# EAGLE board LinCorrector3 (EAGLE 7.4.0)
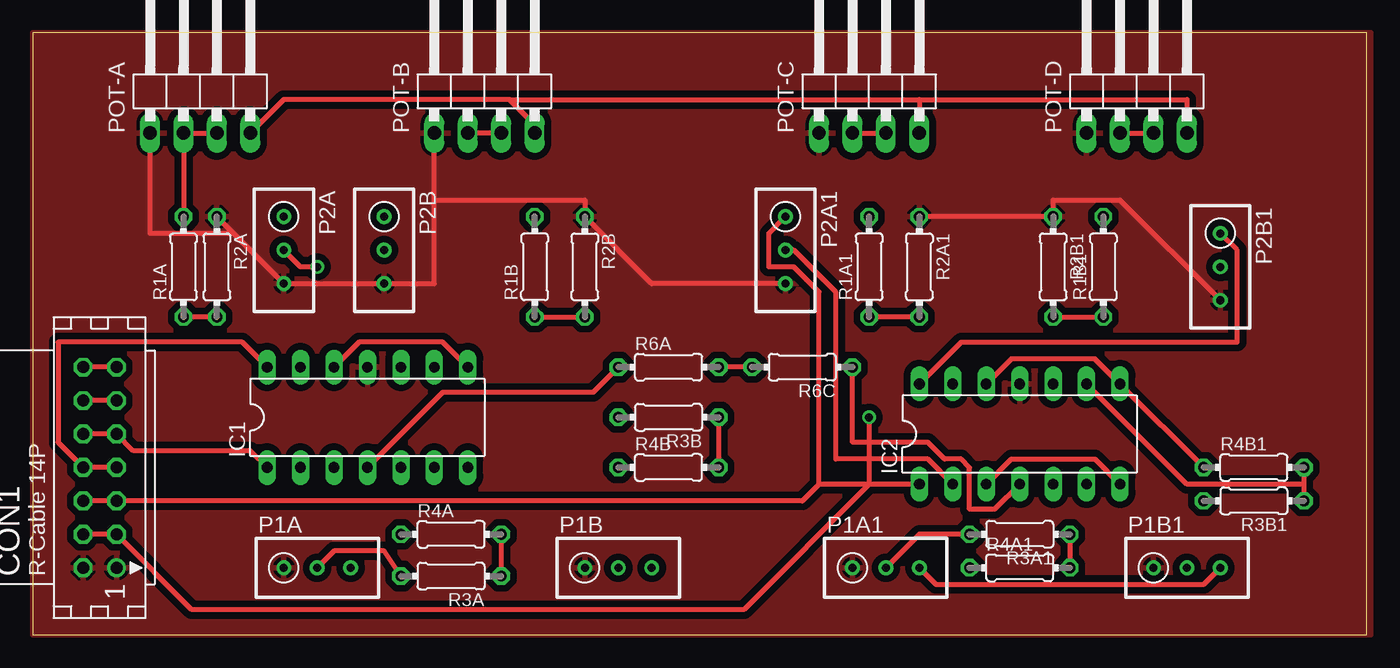
[diagram p0: board, top side]
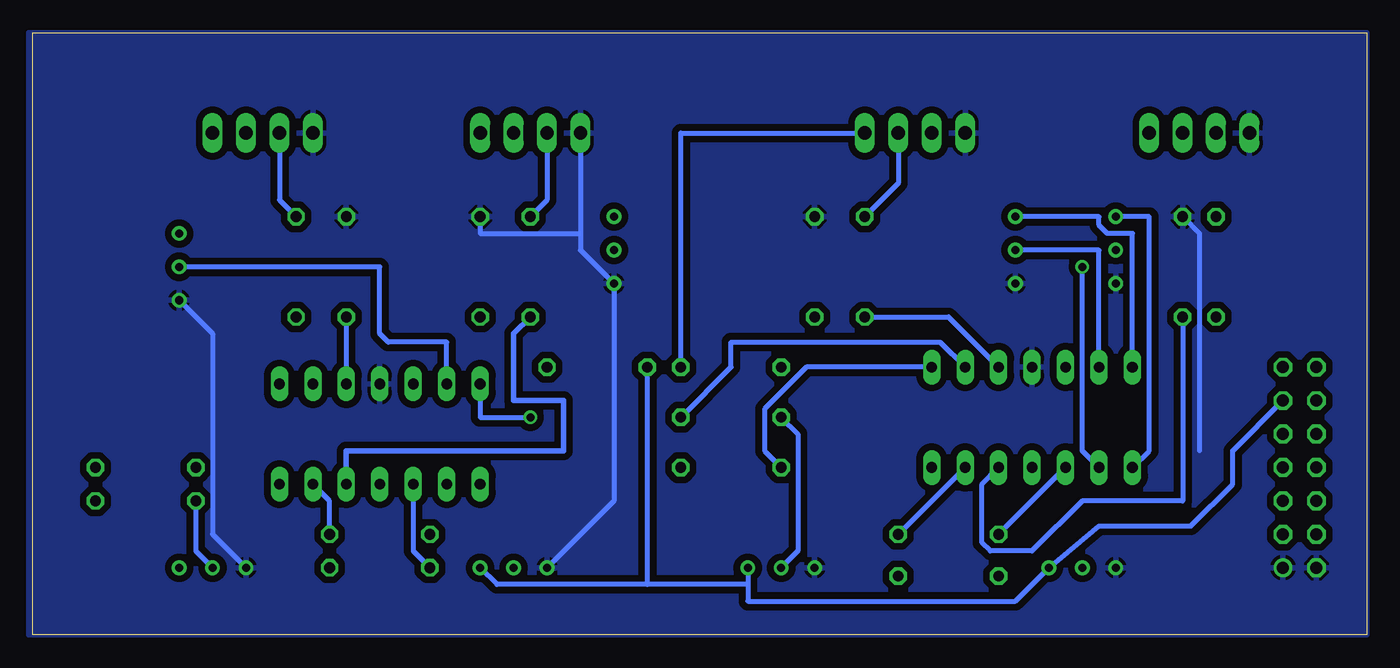
[diagram p1: board, bottom side, seen from below]

Size 101.27 x 45.71 mm. Coordinates in mm from the lower left corner, seen from the top.
Outline: 0,0 101.27,0 101.27,45.71 0,45.71 0,0
Copper layers (1*16): Top 0.035mm / dielectric 1.5mm / Bottom 0.035mm
Design rules "default *": minimum track width 10mil, minimum drill 24mil, track to track 20mil, track to pad 20mil, pad to pad 20mil, via to via 20mil, smd to smd 8mil, copper to edge 0mil, drill to drill 8mil, minimum pad ring 10mil, minimum via ring 8mil, stop-mask expansion 4mil, vias tented up to drill 0mil, thermal gap 10mil
Net classes: 0 default: width 0.381 mm, drill 0.508 mm, clearance 0.381 mm

## Footprints (pad centres in the part's own frame; a part is rotated, then mirrored left to right if it is on the bottom)
CON14 = drill 0.914: 1 -7.62,-1.27 | drill 0.914 octagon: 2 -7.62,1.27; 3 -5.08,-1.27; 4 -5.08,1.27; 5 -2.54,-1.27; 6 -2.54,1.27; 7 0,-1.27; 8 0,1.27; 9 2.54,-1.27; 10 2.54,1.27; 11 5.08,-1.27; 12 5.08,1.27; 13 7.62,-1.27; 14 7.62,1.27
DIL14 = drill 0.813 long: 1 -7.62,-3.81; 2 -5.08,-3.81; 3 -2.54,-3.81; 4 0,-3.81; 5 2.54,-3.81; 6 5.08,-3.81; 7 7.62,-3.81; 8 7.62,3.81; 9 5.08,3.81; 10 2.54,3.81; 11 0,3.81; 12 -2.54,3.81; 13 -5.08,3.81; 14 -7.62,3.81
RTRIM3296W = drill 0.61: 1 0,-2.54; 2 0,0; 3 0,2.54
1X04/90 = drill 1.016 long: 1 -3.81,-3.81; 2 -1.27,-3.81; 3 1.27,-3.81; 4 3.81,-3.81
0204/7 = drill 0.813 octagon: 1 -3.81,0; 2 3.81,0

## Placement (x,y rotation side)
CON1  [CON14]  5.08,12.7 90 top
IC1  MCP604P  [DIL14]  25.4,16.51 0 top
IC2  MCP604P  [DIL14]  74.93,15.24 0 top
P1A  500k  [RTRIM3296W]  21.59,5.08 270 top
P1A1  500k  [RTRIM3296W]  64.77,5.08 270 top
P1B  500k  [RTRIM3296W]  44.45,5.08 270 top
P1B1  500k  [RTRIM3296W]  87.63,5.08 270 top
P2A  500k  [RTRIM3296W]  19.05,29.21 180 top
P2A1  500k  [RTRIM3296W]  57.15,29.21 180 top
P2B  500k  [RTRIM3296W]  26.67,29.21 180 top
P2B1  500k  [RTRIM3296W]  90.17,27.94 180 top
POT-A  [1X04/90]  12.7,41.91 0 top
POT-B  [1X04/90]  34.29,41.91 0 top
POT-C  [1X04/90]  63.5,41.91 0 top
POT-D  [1X04/90]  83.82,41.91 0 top
R1A  10k  [0204/7]  11.43,27.94 90 top
R1A1  10k  [0204/7]  63.5,27.94 90 top
R1B  10k  [0204/7]  38.1,27.94 90 top
R1B1  10k  [0204/7]  81.28,27.94 90 top
R2A  10k  [0204/7]  13.97,27.94 270 top
R2A1  10k  [0204/7]  67.31,27.94 270 top
R2B  10k  [0204/7]  41.91,27.94 270 top
R2B1  10k  [0204/7]  77.47,27.94 270 top
R3A  10k  [0204/7]  31.75,4.45 180 top
R3A1  10k  [0204/7]  74.93,7.62 180 top
R3B  10k  [0204/7]  48.26,16.51 180 top
R3B1  10k  [0204/7]  92.71,10.16 180 top
R4A  10k  [0204/7]  31.75,7.62 0 top
R4A1  10k  [0204/7]  74.93,5.08 0 top
R4B  10k  [0204/7]  48.26,12.7 0 top
R4B1  10k  [0204/7]  92.71,12.7 0 top
R6A  0  [0204/7]  48.26,20.32 0 top
R6C  0  [0204/7]  58.42,20.32 180 top

## Library data of the parts
CON1 = con-harting; OC_FARNELL: unknown; OC_NEWARK: unknown
IC1 IC2 = linear
P1A P1A1 P1B P1B1 P2A P2A1 P2B P2B1 R6A R6C = resistor
POT-A POT-B POT-C POT-D = pinhead
R1A R1A1 R1B R1B1 R2A R2A1 R2B R2B1 R3A R3A1 R3B R3B1 R4A R4A1 R4B R4B1 = rcl

## Nets
GND: CON1.1 CON1.2 IC1.11 IC2.11 P1A1.1 P1A.1 P1B1.1 P1B.1 P2A1.3 P2A.3 P2B1.3 P2B.3 POT-A.1 POT-B.1 POT-C.1 POT-D.1 R2A1.1 R2A.1 R2B1.1 R2B.1
N$1: IC1.5 R1A.1 R2A.2
N$2: POT-A.2 POT-A.3 R1A.2
N$3: P1A.2 R3A.2
N$4: IC1.6 R3A.1 R4A.2
N$5: IC1.3 R4A.1
N$6: IC1.10 R1B.1 R2B.2
N$7: IC1.2 P2A.2
N$8: CON1.9 CON1.10 IC1.1 P2A.1
N$9: P1B.2 R3B.2
N$10: IC1.9 R3B.1 R4B.2
N$11: IC1.8 IC1.12 R4B.1
N$12: IC1.13 P2B.2
N$13: CON1.7 CON1.8 IC1.14 P2B.1
N$14: POT-B.2 POT-B.3 R1B.2
N$15: IC2.5 R1A1.1 R2A1.2
N$16: P1A1.2 R3A1.2
N$17: IC2.6 R3A1.1 R4A1.2
N$18: IC2.3 IC2.7 R4A1.1
N$19: IC2.2 P2A1.2
N$20: CON1.5 CON1.6 IC2.1 P2A1.1
N$21: POT-C.2 POT-C.3 R1A1.2
N$22: IC2.10 R1B1.1 R2B1.2
N$23: P1B1.2 R3B1.2
N$24: IC2.9 R3B1.1 R4B1.2
N$25: IC2.8 IC2.12 R4B1.1
N$26: IC2.13 P2B1.2
N$28: POT-D.2 POT-D.3 R1B1.2
N$29: CON1.3 CON1.4 IC2.14 P2B1.1
N$33: IC1.4 R6A.1
N$35: IC2.4 R6C.1
N$47: CON1.13 CON1.14
VCC: CON1.11 CON1.12 P1A1.3 P1A.3 P1B1.3 P1B.3 POT-A.4 POT-B.4 POT-C.4 POT-D.4 R6A.2 R6C.2

## Tracks (layer width: path | path; a pad name or v marks a point on that pad's centre or on a via)
GND
  Top 0.381: R2A.1 15.24,30.48 | 15.24,30.48 P2A.3 P2B.3 30.48,26.67 30.48,33.02 | POT-A.1 8.89,30.48 15.24,30.48 | 30.48,33.02 POT-B.1 | 30.48,33.02 41.91,33.02 R2B.1 46.99,26.67 P2A1.3 | R2A1.1 R2B1.1 77.47,33.02 82.55,33.02 P2B1.3
  Bottom 0.381: 12.7,13.97 12.7,30.48 R2A.1 | P1B1.1 87.63,7.62 87.63,22.86 P2B1.3 | POT-C.1 59.69,30.48 | 59.69,30.48 59.69,29.21 P2A1.3 57.15,10.16 P1A1.1 | 59.69,30.48 67.31,30.48 R2A1.1
  pour Bottom: 0,45.72 101.6,45.72 101.6,0 0,0
  pour Top: 0,45.72 101.6,45.72 101.6,0 0,0
N$1
  Top 0.381: R2A.2 R1A.1
  Bottom 0.381: IC1.5 29.21,11.43 29.21,6.99 28.57,6.35 25.4,6.35 21.59,10.16 13.97,10.16 R2A.2
N$2
  Top 0.381: R1A.2 POT-A.2 POT-A.3
N$3
  Top 0.381: P1A.2 22.86,6.35 26.67,6.35 R3A.2
N$4
  Top 0.381: R4A.2 R3A.1
  Bottom 0.381: R4A.2 IC1.6
N$5
  Bottom 0.381: R4A.1 IC1.3
N$6
  Top 0.381: R1B.1 R2B.2
  Bottom 0.381: IC1.10 31.75,24.13 R1B.1
N$7  (via drill 0.61)
  Top 0.381: P2A.2 20.32,27.94 v21.59,27.94
  Bottom 0.381: v21.59,27.94 21.59,13.97 IC1.2
N$8
  Top 0.381: CON1.10 CON1.9 7.62,13.97 16.51,13.97 IC1.1
  Bottom 0.381: P2A.1 16.51,31.75 16.51,13.97 IC1.1
N$9
  Bottom 0.381: P1B.2 43.18,6.35 43.18,15.24 R3B.2
N$10
  Top 0.381: R3B.1 R4B.2
  Bottom 0.381: IC1.9 32.38,22.23 48.26,22.23 48.26,20.32 R3B.1
N$11
  Top 0.381: IC1.12 24.77,22.23 31.11,22.23 IC1.8
  Bottom 0.381: R4B.1 45.72,13.97 45.72,17.14 42.55,20.32 IC1.8
N$12
  Bottom 0.381: P2B.2 20.32,29.21 IC1.13
N$13
  Top 0.381: CON1.7 CON1.8 1.91,14.61 1.91,22.23 15.88,22.23 IC1.14
  Bottom 0.381: P2B.1 20.32,31.75 20.32,31.11 19.68,30.48 17.78,30.48 IC1.14
N$14
  Top 0.381: POT-B.3 POT-B.2
  Bottom 0.381: R1B.2 35.56,34.29 POT-B.3
N$15
  Top 0.381: R2A1.2 R1A1.1
  Bottom 0.406: IC2.5 77.47,13.97 60.96,13.97 60.96,17.78 64.77,17.78 64.77,22.86 R1A1.1
N$16
  Top 0.381: P1A1.2 67.31,7.62 R3A1.2
N$17
  Top 0.381: R3A1.1 R4A1.2
  Bottom 0.381: IC2.6 78.74,10.16 R3A1.1
N$18
  Top 0.381: IC2.7 80.64,13.34 74.3,13.34 IC2.3
  Bottom 0.381: R4A1.1 72.39,6.35 IC2.3
N$19
  Top 0.381: P2A1.2 57.78,29.21 60.96,26.04 60.96,13.34 67.94,13.34 IC2.2
N$20
  Top 0.381: CON1.6 CON1.5 58.42,10.16 59.69,11.43 | P2A1.1 55.88,30.48 55.88,27.94 57.78,27.94 59.69,26.04 59.69,11.43 | IC2.1 59.69,11.43
N$21
  Top 0.381: POT-C.2 POT-C.3
  Bottom 0.381: R1A1.2 62.23,33.02 POT-C.2
N$22
  Top 0.381: R2B1.2 R1B1.1
  Bottom 0.381: R2B1.2 IC2.10
N$23
  Bottom 0.381: P1B1.2 88.9,6.35 R3B1.2
N$24
  Top 0.381: R4B1.2 96.52,11.43 | 96.52,11.43 R3B1.1 | IC2.9 87.63,11.43 96.52,11.43
N$25
  Top 0.381: IC2.12 74.3,20.95 80.64,20.95 IC2.8 R4B1.1
N$26
  Bottom 0.381: P2B1.2 74.93,27.94 74.93,22.86 74.3,22.23 69.85,22.23 IC2.13
N$28
  Top 0.381: POT-D.2 POT-D.3
  Bottom 0.381: R1B1.2 82.55,33.02 POT-D.2
N$29  (via drill 0.61)
  Top 0.381: CON1.4 CON1.3 12.06,1.91 53.98,1.91 63.5,11.43 v63.5,16.51 | P2B1.1 91.44,29.21 91.44,22.23 70.48,22.23 IC2.14
  Bottom 0.381: v63.5,16.51 67.31,16.51 IC2.14
N$33
  Top 0.381: IC1.4 31.11,18.41 42.55,18.41 R6A.1
N$35
  Top 0.381: R6C.1 62.23,14.61 67.94,14.61 69.22,13.34 70.48,13.34 71.12,12.7 71.12,9.53 73.03,9.53 IC2.4
N$47
  Top 0.381: CON1.13 CON1.14
VCC
  Top 0.381: POT-A.4 19.05,40.64 36.2,40.64 | 36.2,40.64 38.1,38.73 POT-B.4 | 67.31,40.64 POT-C.4 | 36.2,40.64 67.31,40.64 | POT-D.4 87.63,40.64 67.31,40.64 | CON1.11 CON1.12 | R6C.2 R6A.2 | P1B1.3 88.9,3.81 68.58,3.81 P1A1.3
  Bottom 0.381: P1B.3 46.99,3.81 | 46.99,3.81 46.99,2.54 26.67,2.54 P1A.3 20.32,8.26 13.34,8.26 10.16,11.43 10.16,13.97 CON1.11 | P1A1.3 66.04,3.81 54.61,3.81 | 46.99,3.81 54.61,3.81 | 54.61,3.81 R6C.2 | POT-B.4 52.07,38.1 R6A.2